# Altium PCB Rev3.PcbDoc (part 2 of 3)
Units mil, origin at the board's own origin, x right, y up, seen from the top; angles counter-clockwise.
Board outline 3350 x 2700 mil, 4 copper layers (Top Layer, GND, VCC, Bottom Layer), stack 23.756 mil thick; 157 components, 90 nets, 509 pads, 166 vias.
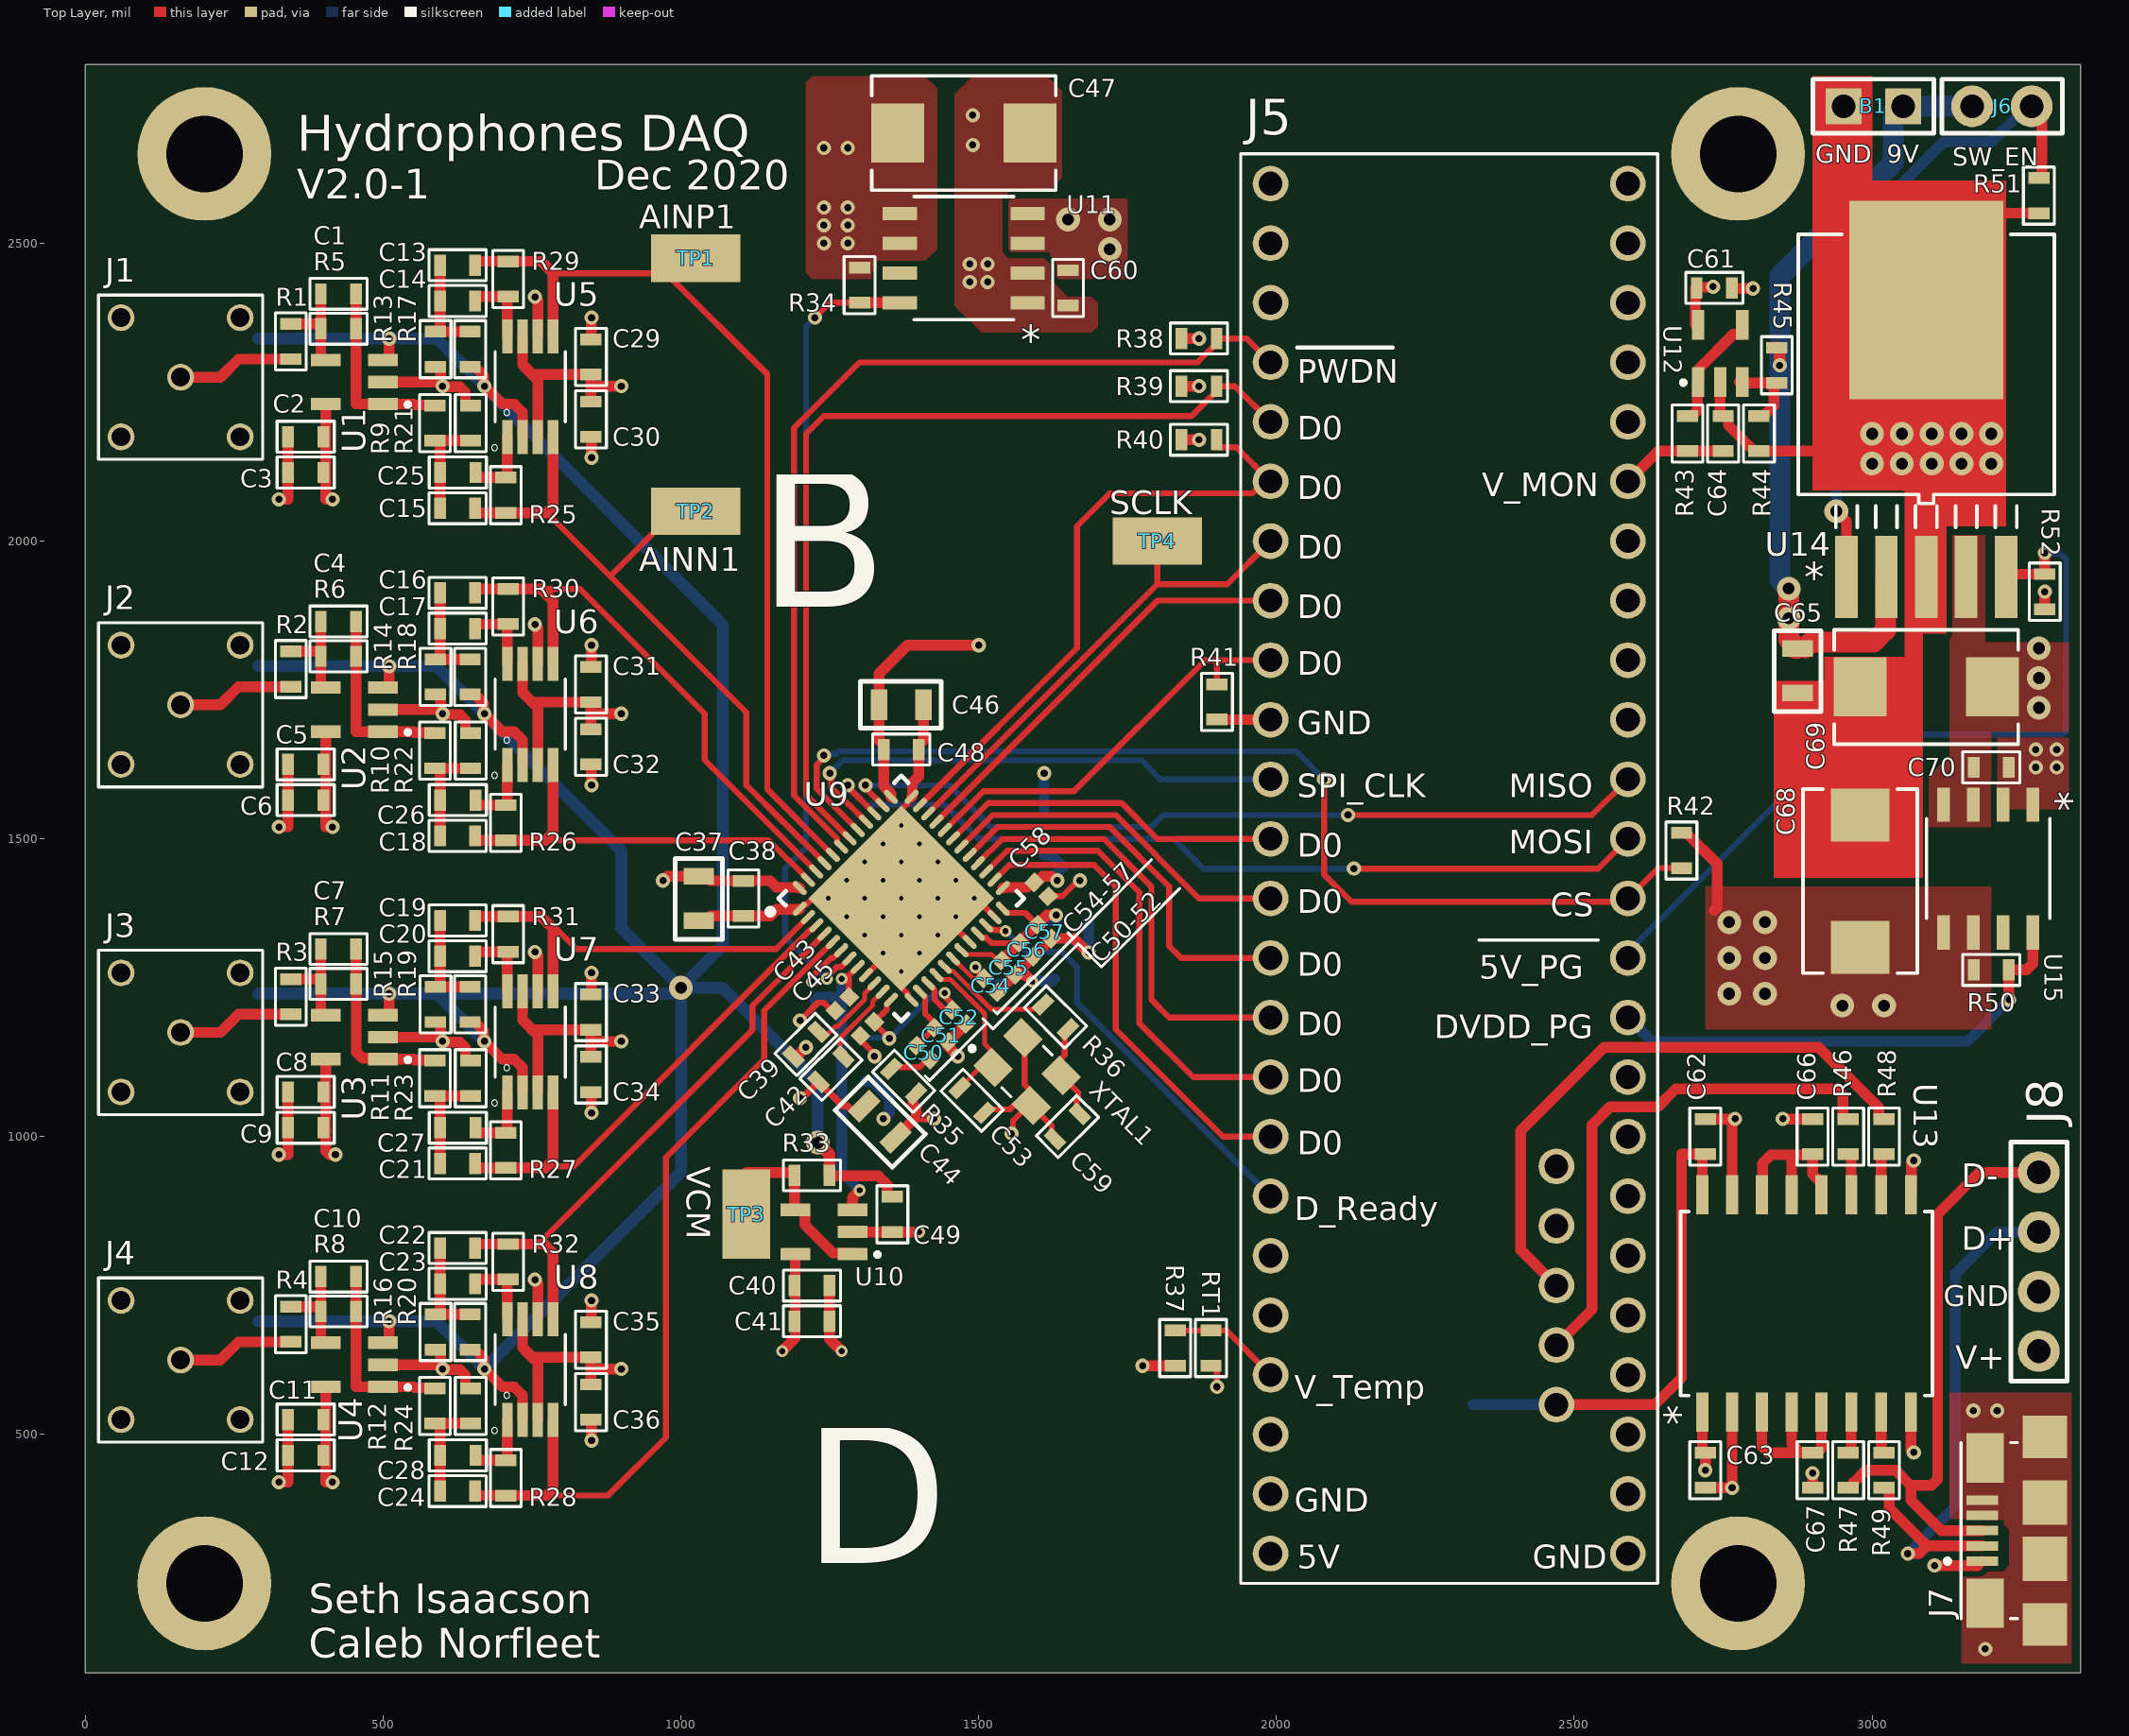
[diagram p0: Top Layer view]

## Part data (continued)
R9 R10 R11 R12 R17 R18 R19 R20: library part RP73PF1J523RBTDF, "RES SMD 523 OHM 0.1% 1/6W 0603", Case Code (Imperial)=0603, Case Code (Metric)=1608, Manufacturer 1="Vishay Dale", Manufacturer Part Number 1=TNPW060310K0BEEA, Max Operating Temperature=125°C, Max Power Dissipation=100mW, Min Operating Temperature=-55°C, Package Quantity=1, Resistance=10kR, Supplier Part Number 1=A110081CT-ND, Temperature Coefficient=25ppm/°C, Tolerance=1%, Voltage Rating=75V, Case/Package=0603, ComponentLink1Description=https://datasheet.ciiva.com/2483/tnpw-e3-2483253.pdf?src-supplier=Digi-Key, ComponentLink1URL=https://datasheet.ciiva.com/2483/tnpw-e3-2483253.pdf?src-supplier=Digi-Key, ComponentLink2Description=https://datasheet.ciiva.com/17190/tnpw-e3-17190917.pdf?src-supplier=Avnet+Europe, ComponentLink2URL=https://datasheet.ciiva.com/17190/tnpw-e3-17190917.pdf?src-supplier=Avnet+Europe, ComponentLink3Description=https://datasheet.ciiva.com/2483/tnpw-e3-2483254.pdf?src-supplier=Digi-Key, ComponentLink3URL=https://datasheet.ciiva.com/2483/tnpw-e3-2483254.pdf?src-supplier=Digi-Key, ComponentLink4Description=https://datasheet.ciiva.com/2483/tnpw-e3-2483255.pdf?src-supplier=Digi-Key, ComponentLink4URL=https://datasheet.ciiva.com/2483/tnpw-e3-2483255.pdf?src-supplier=Digi-Key, ComponentLink5Description=https://datasheet.ciiva.com/16335/tnpw-e3-16335132.pdf?src-supplier=Future+Electronics, ComponentLink5URL=https://datasheet.ciiva.com/16335/tnpw-e3-16335132.pdf?src-supplier=Future+Electronics, ComponentLink6Description=https://datasheet.ciiva.com/28589/1912606-28589004.pdf?src-supplier=Element14, ComponentLink6URL=https://datasheet.ciiva.com/28589/1912606-28589004.pdf?src-supplier=Element14, ComponentLink7Description=https://datasheet.ciiva.com/7792/tnpw-e3-7792477.pdf?src-supplier=Element14, ComponentLink7URL=https://datasheet.ciiva.com/7792/tnpw-e3-7792477.pdf?src-supplier=Element14, ComponentLink8Description=https://datasheet.ciiva.com/9050/tnpw-e3-9050974.pdf?src-supplier=Avnet, ComponentLink8URL=https://datasheet.ciiva.com/9050/tnpw-e3-9050974.pdf?src-supplier=Avnet, Composition="Thin Film", Contact Plating=Tin, Depth=0.85mm, Features="Moisture Resistant,Automotive AEC-Q200,Anti-Sulfur", Height=0.022inch, Length=1.6mm, Military Standard=Not, Mount="Surface Mount", Number of Terminations=2, Packaging="Tape and Reel", Power Rating=100mW, Pricing 1="1=0.65000, 10=0.46200, 100=0.24020, 1000=0.12936, 2500=0.12760 (USD)", Radiation Hardening=No, REACH SVHC=Unknown, RoHS=Yes, Stock 1=296181, Supplier 1=Digi-Key, Termination=SMD/SMT, Weight=7.1E-05oz, Width=0.033inch
R13 R14 R15 R16 R21 R22 R23 R24: library part RP73PF1J383RBTDF, "RES SMD 383 OHM ±0.1% 0.167W, 1/6W Chip Resistor 0603 (1608 Metric) - Thin Film", Case Code (Imperial)=0603, Case Code (Metric)=1608, Manufacturer 1="Vishay Dale", Manufacturer Part Number 1=TNPW060310K0BEEA, Max Operating Temperature=125°C, Max Power Dissipation=100mW, Min Operating Temperature=-55°C, Package Quantity=1, Resistance=10kR, Supplier Part Number 1=A110068CT-ND, Temperature Coefficient=25ppm/°C, Tolerance=1%, Voltage Rating=75V, Case/Package=0603, ComponentLink1Description=https://datasheet.ciiva.com/2483/tnpw-e3-2483253.pdf?src-supplier=Digi-Key, ComponentLink1URL=https://datasheet.ciiva.com/2483/tnpw-e3-2483253.pdf?src-supplier=Digi-Key, ComponentLink2Description=https://datasheet.ciiva.com/17190/tnpw-e3-17190917.pdf?src-supplier=Avnet+Europe, ComponentLink2URL=https://datasheet.ciiva.com/17190/tnpw-e3-17190917.pdf?src-supplier=Avnet+Europe, ComponentLink3Description=https://datasheet.ciiva.com/2483/tnpw-e3-2483254.pdf?src-supplier=Digi-Key, ComponentLink3URL=https://datasheet.ciiva.com/2483/tnpw-e3-2483254.pdf?src-supplier=Digi-Key, ComponentLink4Description=https://datasheet.ciiva.com/2483/tnpw-e3-2483255.pdf?src-supplier=Digi-Key, ComponentLink4URL=https://datasheet.ciiva.com/2483/tnpw-e3-2483255.pdf?src-supplier=Digi-Key, ComponentLink5Description=https://datasheet.ciiva.com/16335/tnpw-e3-16335132.pdf?src-supplier=Future+Electronics, ComponentLink5URL=https://datasheet.ciiva.com/16335/tnpw-e3-16335132.pdf?src-supplier=Future+Electronics, ComponentLink6Description=https://datasheet.ciiva.com/28589/1912606-28589004.pdf?src-supplier=Element14, ComponentLink6URL=https://datasheet.ciiva.com/28589/1912606-28589004.pdf?src-supplier=Element14, ComponentLink7Description=https://datasheet.ciiva.com/7792/tnpw-e3-7792477.pdf?src-supplier=Element14, ComponentLink7URL=https://datasheet.ciiva.com/7792/tnpw-e3-7792477.pdf?src-supplier=Element14, ComponentLink8Description=https://datasheet.ciiva.com/9050/tnpw-e3-9050974.pdf?src-supplier=Avnet, ComponentLink8URL=https://datasheet.ciiva.com/9050/tnpw-e3-9050974.pdf?src-supplier=Avnet, Composition="Thin Film", Contact Plating=Tin, Depth=0.85mm, Features="Moisture Resistant,Automotive AEC-Q200,Anti-Sulfur", Height=0.022inch, Length=1.6mm, Military Standard=Not, Mount="Surface Mount", Number of Terminations=2, Packaging="Tape and Reel", Power Rating=100mW, Pricing 1="1=0.65000, 10=0.46200, 100=0.24020, 1000=0.12936, 2500=0.12760 (USD)", Radiation Hardening=No, REACH SVHC=Unknown, RoHS=Yes, Stock 1=296181, Supplier 1=Digi-Key, Termination=SMD/SMT, Weight=7.1E-05oz, Width=0.033inch
R25 R26 R27 R28 R29 R30 R31 R32: library part 2-2176088-2, "RES SMD 1.27K OHM 0.1% 1/6W 0603", Case Code (Imperial)=0603, Case Code (Metric)=1608, Manufacturer 1="Vishay Dale", Manufacturer Part Number 1=TNPW060310K0BEEA, Max Operating Temperature=125°C, Max Power Dissipation=100mW, Min Operating Temperature=-55°C, Package Quantity=1, Resistance=10kR, Supplier Part Number 1=A110118CT-ND, Temperature Coefficient=25ppm/°C, Tolerance=1%, Voltage Rating=75V, Case/Package=0603, ComponentLink1Description=https://datasheet.ciiva.com/2483/tnpw-e3-2483253.pdf?src-supplier=Digi-Key, ComponentLink1URL=https://datasheet.ciiva.com/2483/tnpw-e3-2483253.pdf?src-supplier=Digi-Key, ComponentLink2Description=https://datasheet.ciiva.com/17190/tnpw-e3-17190917.pdf?src-supplier=Avnet+Europe, ComponentLink2URL=https://datasheet.ciiva.com/17190/tnpw-e3-17190917.pdf?src-supplier=Avnet+Europe, ComponentLink3Description=https://datasheet.ciiva.com/2483/tnpw-e3-2483254.pdf?src-supplier=Digi-Key, ComponentLink3URL=https://datasheet.ciiva.com/2483/tnpw-e3-2483254.pdf?src-supplier=Digi-Key, ComponentLink4Description=https://datasheet.ciiva.com/2483/tnpw-e3-2483255.pdf?src-supplier=Digi-Key, ComponentLink4URL=https://datasheet.ciiva.com/2483/tnpw-e3-2483255.pdf?src-supplier=Digi-Key, ComponentLink5Description=https://datasheet.ciiva.com/16335/tnpw-e3-16335132.pdf?src-supplier=Future+Electronics, ComponentLink5URL=https://datasheet.ciiva.com/16335/tnpw-e3-16335132.pdf?src-supplier=Future+Electronics, ComponentLink6Description=https://datasheet.ciiva.com/28589/1912606-28589004.pdf?src-supplier=Element14, ComponentLink6URL=https://datasheet.ciiva.com/28589/1912606-28589004.pdf?src-supplier=Element14, ComponentLink7Description=https://datasheet.ciiva.com/7792/tnpw-e3-7792477.pdf?src-supplier=Element14, ComponentLink7URL=https://datasheet.ciiva.com/7792/tnpw-e3-7792477.pdf?src-supplier=Element14, ComponentLink8Description=https://datasheet.ciiva.com/9050/tnpw-e3-9050974.pdf?src-supplier=Avnet, ComponentLink8URL=https://datasheet.ciiva.com/9050/tnpw-e3-9050974.pdf?src-supplier=Avnet, Composition="Thin Film", Contact Plating=Tin, Depth=0.85mm, Features="Moisture Resistant,Automotive AEC-Q200,Anti-Sulfur", Height=0.022inch, Length=1.6mm, Military Standard=Not, Mount="Surface Mount", Number of Terminations=2, Packaging="Tape and Reel", Power Rating=100mW, Pricing 1="1=0.65000, 10=0.46200, 100=0.24020, 1000=0.12936, 2500=0.12760 (USD)", Radiation Hardening=No, REACH SVHC=Unknown, RoHS=Yes, Stock 1=296181, Supplier 1=Digi-Key, Termination=SMD/SMT, Weight=7.1E-05oz, Width=0.033inch
R33 R35: library part TNPW06031K00BEEA, "RES 1K OHM 0.1% 1/8W 0603", Case Code (Imperial)=0603, Case Code (Metric)=1608, Manufacturer 1="Vishay Dale", Max Operating Temperature=125°C, Max Power Dissipation=100mW, Min Operating Temperature=-55°C, Package Quantity=1, Resistance=1kR, Supplier Part Number 1=TNP1.00KAACT-ND, Temperature Coefficient=25ppm/°C, Tolerance=1%, Voltage Rating=75V, Case/Package=0603, ComponentLink1Description=https://datasheet.ciiva.com/2528/tnpw-e3-2528472.pdf?src-supplier=Digi-Key, ComponentLink1URL=https://datasheet.ciiva.com/2528/tnpw-e3-2528472.pdf?src-supplier=Digi-Key, ComponentLink2Description=https://datasheet.ciiva.com/2528/tnpw-e3-2528473.pdf?src-supplier=Digi-Key, ComponentLink2URL=https://datasheet.ciiva.com/2528/tnpw-e3-2528473.pdf?src-supplier=Digi-Key, ComponentLink3Description=https://datasheet.ciiva.com/9112/tnpw-e3-9112138.pdf?src-supplier=Avnet, ComponentLink3URL=https://datasheet.ciiva.com/9112/tnpw-e3-9112138.pdf?src-supplier=Avnet, ComponentLink4Description=https://datasheet.ciiva.com/16391/tnpw-e3-16391675.pdf?src-supplier=Future+Electronics, ComponentLink4URL=https://datasheet.ciiva.com/16391/tnpw-e3-16391675.pdf?src-supplier=Future+Electronics, ComponentLink5Description=https://datasheet.ciiva.com/9112/tnpw-e3-9112141.pdf?src-supplier=Avnet, ComponentLink5URL=https://datasheet.ciiva.com/9112/tnpw-e3-9112141.pdf?src-supplier=Avnet, ComponentLink6Description=https://datasheet.ciiva.com/16782/70201627-16782047.pdf?src-supplier=Allied+Electronics, ComponentLink6URL=https://datasheet.ciiva.com/16782/70201627-16782047.pdf?src-supplier=Allied+Electronics, Composition="Thin Film", Contact Plating=Tin, Depth=0.85mm, Features="Moisture Resistant,Automotive AEC-Q200,Anti-Sulfur", Height=0.45mm, Lead Free="Lead Free", Length=1.6mm, Manufacturer Part Number 1=TNPW06031K00BEEA, Military Standard=Not, Mount="Surface Mount", Number of Terminations=2, Packaging="Tape and Reel", Power Rating=100mW, Pricing 1="1=0.65000, 10=0.46200, 100=0.24020, 1000=0.12936, 2500=0.12760 (USD)", Radiation Hardening=No, REACH SVHC=Unknown, RoHS=Yes, Stock 1=92047, Supplier 1=Digi-Key, Termination=SMD/SMT, Voltage Rating (DC)=75V, Weight=7.1E-05oz, Width=0.033inch
R34 R43 R50: library part CRGCQ0603F150K, "CRGCQ 0603 150K 1%", Case Code (Imperial)=0603, Case Code (Metric)=1608, Manufacturer 1=Yageo, Manufacturer Part Number 1=RC0603JR-0710KL, Max Operating Temperature=155°C, Min Operating Temperature=-55°C, Power Rating=100mW, Resistance=10kR, Supplier Part Number 1=311-10KGRCT-ND, Temperature Coefficient=100ppm/°C, Tolerance=5%, Voltage Rating=50V, Case/Package=0603, ComponentLink1Description=https://datasheet.ciiva.com/2452/pyu-rc0603-51-rohs-l-4-2452848.pdf?src-supplier=Digi-Key, ComponentLink1URL=https://datasheet.ciiva.com/2452/pyu-rc0603-51-rohs-l-4-2452848.pdf?src-supplier=Digi-Key, ComponentLink2Description=https://datasheet.ciiva.com/7746/443971-7746427.pdf?src-supplier=Element14, ComponentLink2URL=https://datasheet.ciiva.com/7746/443971-7746427.pdf?src-supplier=Element14, ComponentLink3Description=https://datasheet.ciiva.com/22747/443971-22747531.pdf?src-supplier=Element14, ComponentLink3URL=https://datasheet.ciiva.com/22747/443971-22747531.pdf?src-supplier=Element14, ComponentLink4Description=https://datasheet.ciiva.com/7746/443971-7746428.pdf?src-supplier=Element14, ComponentLink4URL=https://datasheet.ciiva.com/7746/443971-7746428.pdf?src-supplier=Element14, ComponentLink5Description=https://datasheet.ciiva.com/15189/getdatasheetpartid-327958-15189847.pdf?src-supplier=Verical, ComponentLink5URL=https://datasheet.ciiva.com/15189/getdatasheetpartid-327958-15189847.pdf?src-supplier=Verical, ComponentLink6Description=https://datasheet.ciiva.com/8883/pyu-rc0603-51-rohs-l-4-8883049.pdf?src-supplier=Avnet, ComponentLink6URL=https://datasheet.ciiva.com/8883/pyu-rc0603-51-rohs-l-4-8883049.pdf?src-supplier=Avnet, Composition="Thick Film", Contact Plating=Tin,Matte, Depth=0.8mm, Lead Free="Lead Free", Length=1.6mm, Military Standard=Not, Number of Pins=2, Packaging="Tape and Reel", Pricing 1="1=0.10000, 10=0.01700, 100=0.00710, 1000=0.00318, 2500=0.00276 (USD)", Radiation Hardening=No, REACH SVHC=Unknown, RoHS=Yes, Stock 1=22910838, Supplier 1=Digi-Key, Termination=SMD/SMT, Voltage Rating (DC)=50V, Width=0.8mm
R36: library part RP73PF1J121RBTDF, "TE CONNECTIVITY         RP73PF1J121RBTDF             SMD Chip Resistor, Thin Film, 121 ohm, 100 V, 0603 [1608 Metric], 166 mW,  0.1%, RN73 Series", Case Code (Imperial)=0603, Case Code (Metric)=1608, Manufacturer 1="TE Connectivity", Max Operating Temperature=155°C, Max Power Dissipation=167mW, Min Operating Temperature=-55°C, Package Quantity=1000, Power Rating=166mW, Resistance=121R, Supplier Part Number 1=A110020CT-ND, Temperature Coefficient=25ppm/°C, Tolerance=0.1%, Voltage Rating=100V, Case/Package=0603, ComponentLink1Description=https://datasheet.ciiva.com/7801/1635325-7801605.pdf?src-supplier=Element14, ComponentLink1URL=https://datasheet.ciiva.com/7801/1635325-7801605.pdf?src-supplier=Element14, ComponentLink2Description=https://datasheet.ciiva.com/18601/eng-ds-1773272-j-18601303.pdf?src-supplier=Digi-Key, ComponentLink2URL=https://datasheet.ciiva.com/18601/eng-ds-1773272-j-18601303.pdf?src-supplier=Digi-Key, ComponentLink3Description=https://datasheet.ciiva.com/18601/eng-ds-1773272-j-18601304.pdf?src-supplier=Digi-Key, ComponentLink3URL=https://datasheet.ciiva.com/18601/eng-ds-1773272-j-18601304.pdf?src-supplier=Digi-Key, ComponentLink4Description=https://datasheet.ciiva.com/18601/eng-ds-1773272-j-18601305.pdf?src-supplier=Digi-Key, ComponentLink4URL=https://datasheet.ciiva.com/18601/eng-ds-1773272-j-18601305.pdf?src-supplier=Digi-Key, Composition="Thin Film", Depth=0.8mm, Height=0.022inch, Length=0.061inch, Manufacturer Part Number 1=RP73PF1J121RBTDF, Mount="Surface Mount", Number of Terminations=2, Packaging="Tape and Reel", Pricing 1="1=0.66000, 10=0.48500, 100=0.28230 (USD)", REACH SVHC="No SVHC", RoHS=Yes, Stock 1=850, Supplier 1=Digi-Key, Termination=Solder, Voltage Rating (DC)=100V, Width=0.031inch
R37 R38 R39 R40 R41 R42 R44 R51 R52: library part RC0603JR-0710KL, "RES SMD 10K OHM 5% 1/10W 0603"
R45: library part MCT06030E2002BP500, "Res Thin Film 0603 20K Ohm 0.1% 0.1W(1/10W) ±15ppm/C Molded SMD Automotive Medical Paper T/R", Case/Package=0603, Manufacturer 1="Vishay Semiconductors", Max Operating Temperature=125°C, Min Operating Temperature=-55°C, Resistance=20kR, Supplier Part Number 1=749-1747-1-ND, Temperature Coefficient=15ppm/°C, Tolerance=0.1%, ComponentLink1Description=https://datasheet.ciiva.com/17185/mc-pre-17185448.pdf?src-supplier=Avnet+Europe, ComponentLink1URL=https://datasheet.ciiva.com/17185/mc-pre-17185448.pdf?src-supplier=Avnet+Europe, ComponentLink2Description=https://datasheet.ciiva.com/8897/mc-pre-8897916.pdf?src-supplier=Avnet, ComponentLink2URL=https://datasheet.ciiva.com/8897/mc-pre-8897916.pdf?src-supplier=Avnet, Composition="Thin Film", Contact Plating=Tin, Depth=0.85mm, Lead Free="Lead Free", Length=1.55mm, Manufacturer Part Number 1=MCT06030E2002BP500, Military Standard=Not, Packaging="Tape and Reel", Pricing 1="1=0.70000, 10=0.58600, 100=0.39360, 1000=0.23128 (USD)", Radiation Hardening=No, RoHS=Yes, Stock 1=75960, Supplier 1=Digi-Key
R46 R47 R48 R49: library part ERJU03F24R0V, "Thick Film Resistors - SMD 0603 1% 24ohm Anti-Sulfur AEC-Q200", Case Code (Imperial)=0603, Case Code (Metric)=1608, Current Rating=1A, Manufacturer 1=Panasonic, Max Operating Temperature=155°C, Min Operating Temperature=-55°C, Package Quantity=5000, Power Rating=100mW, Resistance=24R, Resistor Type="Thick Film", Supplier Part Number 1=10-ERJ-U03F24R0VCT-ND, Temperature Coefficient=100ppm/°C, Tolerance=1%, Voltage Rating=75V, Case/Package=0603, Category="Chip SMD Resistors", ComponentLink1Description=https://datasheet.ciiva.com/24124/ras-erj-u-267552-24124922.pdf?src-supplier=Mouser, ComponentLink1URL=https://datasheet.ciiva.com/24124/ras-erj-u-267552-24124922.pdf?src-supplier=Mouser, ComponentLink2Description=https://datasheet.ciiva.com/6201/1638979-6201577.pdf?src-supplier=Farnell, ComponentLink2URL=https://datasheet.ciiva.com/6201/1638979-6201577.pdf?src-supplier=Farnell, Depth=0.8mm, Height=0.45mm, Length=1.6mm, Manufacturer Part Number 1=ERJU03F24R0V, Packaging="Tape and Reel", Pricing 1="1=0.13000, 10=0.11400, 100=0.04400, 1000=0.01936, 2500=0.01672 (USD)", REACH SVHC="No SVHC", RoHS=Yes, Stock 1=298, Supplier 1=Digi-Key, Termination=SMD/SMT, Voltage Rating (DC)=75V, Weight=7.1E-05oz, Width=0.8mm
RT1: library part ERT-J1VG103JA, "Thermistor NTC 10KOhm 5% 2-Pin 0603 Punched Carrier T/R", Case Code (Imperial)=0603, Case Code (Metric)=1608, Manufacturer 1=Panasonic, Max Operating Temperature=125°C, Max Power Dissipation=100mW, Min Operating Temperature=-40°C, Package Quantity=4000, Resistance=10kR, Supplier Part Number 1=P12014CT-ND, Tolerance=5%, Accuracy=1%, Case/Package=0603, ComponentLink1Description=https://datasheet.ciiva.com/1303/1314428-1303168.pdf?src-supplier=Farnell, ComponentLink1URL=https://datasheet.ciiva.com/1303/1314428-1303168.pdf?src-supplier=Farnell, ComponentLink2Description=https://datasheet.ciiva.com/30067/aua0000ce1-30067157.pdf?src-supplier=Onlinecomponents.com, ComponentLink2URL=https://datasheet.ciiva.com/30067/aua0000ce1-30067157.pdf?src-supplier=Onlinecomponents.com, ComponentLink3Description=https://datasheet.ciiva.com/46376/1314428-46376550.pdf?src-supplier=Element14, ComponentLink3URL=https://datasheet.ciiva.com/46376/1314428-46376550.pdf?src-supplier=Element14, ComponentLink4Description=https://datasheet.ciiva.com/2848/aua0000ce1-2848556.pdf?src-supplier=Digi-Key, ComponentLink4URL=https://datasheet.ciiva.com/2848/aua0000ce1-2848556.pdf?src-supplier=Digi-Key, ComponentLink5Description=https://datasheet.ciiva.com/16394/aua0000ce1-16394028.pdf?src-supplier=Future+Electronics, ComponentLink5URL=https://datasheet.ciiva.com/16394/aua0000ce1-16394028.pdf?src-supplier=Future+Electronics, ComponentLink6Description=https://datasheet.ciiva.com/46388/1314428-46388812.pdf?src-supplier=Element14, ComponentLink6URL=https://datasheet.ciiva.com/46388/1314428-46388812.pdf?src-supplier=Element14, ComponentLink7Description=https://datasheet.ciiva.com/2848/aua0000ce1-2848557.pdf?src-supplier=Digi-Key, ComponentLink7URL=https://datasheet.ciiva.com/2848/aua0000ce1-2848557.pdf?src-supplier=Digi-Key, ComponentLink8Description=https://datasheet.ciiva.com/2848/aua0000ce1-2848558.pdf?src-supplier=Digi-Key, ComponentLink8URL=https://datasheet.ciiva.com/2848/aua0000ce1-2848558.pdf?src-supplier=Digi-Key, ComponentLink9Description=https://datasheet.ciiva.com/3280/aua0000ce1-3280462.pdf?src-supplier=Avnet, ComponentLink9URL=https://datasheet.ciiva.com/3280/aua0000ce1-3280462.pdf?src-supplier=Avnet, Depth=0.8mm, Lead Free="Lead Free", Length=1.6mm, Manufacturer Part Number 1=ERT-J1VG103JA, Mount="Surface Mount", Number of Pins=2, Packaging="Tape and Reel", Pricing 1="1=0.15000, 5=0.14600, 10=0.13000, 25=0.12000, 50=0.09600, 100=0.08240, 500=0.07208, 1000=0.06178 (USD)", Radiation Hardening=No, REACH SVHC="No SVHC", RoHS=Yes, Stock 1=47318, Supplier 1=Digi-Key, Termination=SMD/SMT, Width=800um
TP1 TP2 TP4: "5029 SMD 0805 TP", Supplier Part Number 1=36-5029CT-ND, Supplier 1=Digi-Key
TP3: "RCT-0C SMD 0805 TP", Supplier Part Number 1=A106144CT-ND, Supplier 1=Digi-Key
U1 U2 U3 U4: library part OPA320AQDBVRQ1, "General Purpose Amplifier Circuit Rail-to-Rail SOT-23-5", Manufacturer 1="Texas Instruments", Manufacturer Part Number 1=OPA325IDBVR, Supplier Part Number 1=296-OPA325IDBVRCT-ND, Pricing 1="1=1.69000, 10=1.51600, 25=1.43000, 100=1.14400, 250=1.00100, 500=0.97240, 1000=0.77220 (USD)", RoHS=No, Stock 1=2034, Supplier 1=Digi-Key
U5 U6 U7 U8: "Low Noise, Precision, 150MHz, Fully Differential Amplifier 8-VSSOP -40 to 125", Case/Package=VSSOP, Input Bias Current=1uA, Input Offset Voltage (Vos)=50uV, Manufacturer 1="Texas Instruments", Max Operating Temperature=125°C, Min Operating Temperature=-40°C, Operating Supply Current=1.35mA, Output Current per Channel=65mA, Supplier Part Number 1=296-44771-1-ND, -3db Bandwidth=150MHz, Bandwidth=135MHz, ComponentLink1Description=http://www.ti.com/lit/ds/symlink/ths4551.pdf?src-supplier=Digi-Key, ComponentLink1URL=http://www.ti.com/lit/ds/symlink/ths4551.pdf?src-supplier=Digi-Key, ComponentLink2Description=http://www.ti.com/general/docs/lit/getliterature.tsp?genericPartNumber=THS4551&fileType=pdf&src-supplier=Farnell, ComponentLink2URL=http://www.ti.com/general/docs/lit/getliterature.tsp?genericPartNumber=THS4551&fileType=pdf&src-supplier=Farnell, ComponentLink3Description=http://www.farnell.com/datasheets/2148327.pdf?src-supplier=Element14, ComponentLink3URL=http://www.farnell.com/datasheets/2148327.pdf?src-supplier=Element14, ComponentLink4Description=https://octopart.com/click/track?ai=2118&ct=datasheets&sig=0013830&at=physicalpart&sid=370&ppid=71776714&hlid=24961842&src-supplier=TI+store, ComponentLink4URL=https://octopart.com/click/track?ai=2118&ct=datasheets&sig=0013830&at=physicalpart&sid=370&ppid=71776714&hlid=24961842&src-supplier=TI+store, ComponentLink5Description=http://sigma.octopart.com/49250154/technical_drawing/Texas-Instruments-THS4551IDGKT.pdf?src-supplier=TI+store, ComponentLink5URL=http://sigma.octopart.com/49250154/technical_drawing/Texas-Instruments-THS4551IDGKT.pdf?src-supplier=TI+store, ComponentLink6Description=http://datasheet.octopart.com/THS4551IDGKT-Texas-Instruments-datasheet-78835010.pdf?src-supplier=Element14, ComponentLink6URL=http://datasheet.octopart.com/THS4551IDGKT-Texas-Instruments-datasheet-78835010.pdf?src-supplier=Element14, ComponentLink7Description=http://datasheet.octopart.com/THS4551IDGKT-Texas-Instruments-datasheet-67294894.pdf?src-supplier=Newark, ComponentLink7URL=http://datasheet.octopart.com/THS4551IDGKT-Texas-Instruments-datasheet-67294894.pdf?src-supplier=Newark, ComponentLink8Description=https://www.te.com/commerce/DocumentDelivery/DDEController?Action=srchrtrv&DocNm=1773204-3&DocType=DS&DocLang=English&src-supplier=Digi-Key, ComponentLink8URL=https://www.te.com/commerce/DocumentDelivery/DDEController?Action=srchrtrv&DocNm=1773204-3&DocType=DS&DocLang=English&src-supplier=Digi-Key, ComponentLink9Description=https://www.te.com/commerce/DocumentDelivery/DDEController?Action=srchrtrv&amp;DocNm=1773204-3&amp;DocType=DS&amp;DocLang=English&src-supplier=Digi-Key, ComponentLink9URL=https://www.te.com/commerce/DocumentDelivery/DDEController?Action=srchrtrv&amp;DocNm=1773204-3&amp;DocType=DS&amp;DocLang=English&src-supplier=Digi-Key, Gain Bandwidth Product=135MHz, Lead Free="Lead Free", Manufacturer Part Number 1=THS4551IDGKT, Mount="Surface Mount", Number of Amplifiers=1, Number of Channels=1, Number of Circuits=1, Number of Pins=8, Packaging="Cut Tape", Pricing 1="1=3.84000, 10=3.44900, 100=2.82600 (USD)", REACH SVHC="No SVHC", RoHS=No, Slew Rate=220V/µs, Stock 1=3028, Supplier 1=Digi-Key
U9: library part CMP-0313-02423-1, "Continuous Time Data Acquisition ADC, 4-Channel, 16-Bit, -40 to 125 degC, 48-Pin QFN (CS-48-1), RoHS, Tray", Temperature Max="125 degC", Temperature Min="-40 degC", AVDD Max="3.6 V", AVDD Min="2.97 V", Channel=4, ComponentLink1Description="Manufacturer URL", ComponentLink1URL=http://www.analog.com/en/index.html, ComponentLink2Description=Datasheet, ComponentLink2URL=http://www.analog.com/media/en/technical-documentation/data-sheets/ADAR7251.pdf, ComponentLink3Description="Package Specification", ComponentLink3URL=http://www.analog.com/media/en/package-pcb-resources/package/pkg_pdf/lfcsp-cs-side-solderable/cs-48/CS_48_1.pdf, DatasheetVersion="Rev. 0", DVDD Max="1.98 V", DVDD Min="1.62 V", Mounting Technology="Surface Mount", Number of A/D Converters=4, PackageDescription="48-Pin Frame Chip Scale Package, Body 7 x 7 mm, Pitch 0.5 mm", PackageVersion=01/2014, Packing=Tray, PartNumber=ADAR7251WBCSZ, RoHS=TRUE, Sample Rate Max="1.8 MSPS"
U10 U12: library part OPA325IDBVR, Manufacturer 1="Texas Instruments", Supplier Part Number 1=296-OPA325IDBVRCT-ND, Manufacturer Part Number 1=OPA325IDBVR, Pricing 1="1=1.69000, 10=1.51600, 25=1.43000, 100=1.14400, 250=1.00100, 500=0.97240, 1000=0.77220 (USD)", RoHS=No, Stock 1=2034, Supplier 1=Digi-Key
U11 U15: "3.3V Linear Voltage Regulator IC 1 Output 1A 8-SOIC", Built_By=EMA_UL_Team, Copyright="Copyright (C) 2018 Accelerated Designs. All rights reserved", Manufacturer_Part_Number=TPS76833QD, RefDes=RefDes, SourceLibrary=TI_2011-12-14_2, Type=DEV, Vendor="Texas Instruments"
U13: "USB Isolation", Built_By=EMA_UL_Team, Copyright="Copyright (C) 2018 Accelerated Designs. All rights reserved", Manufacturer_Part_Number=ADUM3160BRWZ, RefDes=RefDes, SourceLibrary=Analog_2015-12-15, Type=DEV, Vendor="Analog Devices Inc"
U14: "LDO Regulator Pos 5V 3A Automotive 6-Pin(5+Tab) TO-263 T/R", Manufacturer 1=Microchip, Supplier Part Number 1=MIC29301-5.0WU-CT-ND, Category="Voltage Regulators - Linear", ComponentLink1Description=https://datasheet.ciiva.com/16389/mic29150-16389820.pdf?src-supplier=Future+Electronics, ComponentLink1URL=https://datasheet.ciiva.com/16389/mic29150-16389820.pdf?src-supplier=Future+Electronics, ComponentLink2Description=https://datasheet.ciiva.com/2064/mic29150-2064680.pdf?src-supplier=Digi-Key, ComponentLink2URL=https://datasheet.ciiva.com/2064/mic29150-2064680.pdf?src-supplier=Digi-Key, Manufacturer Part Number 1=MIC29301-5.0WU-TR, Pricing 1="1=4.14000, 25=3.45000, 100=3.14000 (USD)", RoHS=Yes, Stock 1=1017, Supplier 1=Digi-Key
XTAL1: "Crystal 19.2MHz ±25ppm (Tol) ±30ppm (Stability) 12pF FUND 80Ohm 4-Pin Mini-CSMD T/R", Manufacturer 1="ECS International", Supplier Part Number 1=XC2452CT-ND, Manufacturer Part Number 1=ECS-192-12-33-AGM-TR, Pricing 1="1=0.56000, 10=0.46500, 50=0.41820, 100=0.37180, 500=0.35322 (USD)", Stock 1=1382, Supplier 1=Digi-Key

## Free pads (board coordinates)
  round 225 hole 128.5: 53(200,2650) 54(200,250) 55(2775,250) 56(2775,2650)

## Via types
v1: diameter 24, hole 12, Top Layer to Bottom Layer, tented both sides, 101 vias
v2: diameter 40, hole 20, Top Layer to Bottom Layer, tented both sides, 29 vias
v3: diameter 19.68, hole 7.87, Top Layer to Bottom Layer, 25 vias
v4: diameter 20, hole 10, Top Layer to Bottom Layer, tented both sides, 11 vias

## Nets (pads, with @x,y where several pads share a name; then routed paths per layer and width w, separated by ;. In a path a pad name is that pad's centre, name@x,y a point inside that pad or via, vN(x,y) a via of type N, cw(c..) or ccw(c..) an arc to the next point about the centre after c; other vN are vias at no path point)
5V: C60.2 C62.2 C69.2 C70.2 J5.48 J5.53 U11.3 U11.4 U13.16 U14.4 U15.3 U15.4 | length 871.3
  Top Layer w18: J5.53@2469.92,550 2635,550 2680,595 2680,970.47 2715.84,970.47 2715,969.63 U13.16@2715,902.5 2715,880.91 U13.16@2714,879.91
  Bottom Layer w18: 2330,550 J5.53@2469.92,550
  other v2: 3280,1720 3280,1770 3280,1820 1720,2490 1650,2540 1720,2540
9V: B1.+ C65.2 J6.2 R45.1 U14.2 | length 1449.3
  Top Layer w20: R45.1@2835,2324.53 R45.1@2842.56,2324.53 ; R45.1@2840,2324.53 2845,2324.53 v1(2845,2295)
  Top Layer w25: C65.2@2875,1819.8 2886.81,1819.8 C65.2@2888.09,1821.08
  Top Layer w35: v2(2860,1920) 2860,1834.8 2866.91,1827.89 2866.91,1823.52 2870.63,1819.8 C65.2@2875,1819.8 ; C65.2@2888.09,1821.08 2897.01,1830 3002,1830 3022.5,1850.5 3022.5,1938.5 U14.2@3024,1940
  Bottom Layer w35: v2(2860,1920) 2845,1935 v1(2845,2295) 2845,2445 3035.5,2635.5 3035.5,2721.5 3048,2734 B1.+@3052,2730 J6.2@3190,2730
  other v2: 2860,1870
ADC_DATA0: J5.41 U9.26 | length 803.2
  Top Layer w10: U9.26@1526.59,1431.32 1551.38,1456.1 1693.9,1456.1 1730,1420 1730,1180 1910,1000 J5.41@1990,1000
ADC_DATA1: J5.40 U9.27 | length 778
  Top Layer w10: U9.27@1512.67,1445.24 1547.44,1480 1700,1480 1770,1410 1770,1190 1860,1100 J5.40@1990,1100
ADC_DATA2: J5.39 U9.28 | length 743.7
  Top Layer w10: U9.28@1498.75,1459.16 1539.6,1500 1710,1500 1790,1420 1790,1230 1820,1200 J5.39@1990,1200
ADC_DATA3: J5.38 U9.29 | length 674.3
  Top Layer w10: U9.29@1484.84,1473.08 1531.76,1520 1720,1520 1820,1420 1820,1320 1840,1300 J5.38@1990,1300
ADC_DATA4: J5.37 U9.30 | length 599
  Top Layer w10: U9.30@1470.92,1487 1523.92,1540 1730,1540 1870,1400 J5.37@1990,1400
ADC_DATA5: J5.36 U9.31 | length 582.3
  Top Layer w10: U9.31@1457,1500.92 1516.08,1560 1740,1560 1800,1500 J5.36@1990,1500
ADC_DATA6: J5.33 R41.2 U9.32 | length 706.6
  Top Layer w10: U9.32@1443.08,1514.84 1508.24,1580 1660,1580 1880,1800 1902.71,1800 ; R41.2@1900,1759.53 1900,1797.29 1902.71,1800 ; J5.33@1990,1800 1902.71,1800
ADC_DATA7: J5.32 U9.33 | length 714.6
  Top Layer w10: U9.33@1429.16,1528.75 1800.4,1900 J5.32@1990,1900
AINN1: C15.2 R25.2 TP2.1 U5.4 U9.45 | length 1229.3
  Top Layer w10: 774.84,2047.47 881.16,1941.16 ; TP2.1@1025,2050 990,2050 881.16,1941.16 ; U9.45@1241.25,1459.16 1172.4,1528 1172,1528 1110,1590 1110,1712.31 881.16,1941.16
  Top Layer w18: C15.2@654.53,2055 654.53,2048.31 655.37,2047.47 R25.2@706,2047.47 774.84,2047.47 785.39,2058.02 U5.4@785.39,2174.35
AINN2: C18.2 R26.2 U6.4 U9.47 | length 725.5
  Top Layer w10: 760,1497.47 772.47,1497.47 1147.25,1497.47 U9.47@1213.41,1431.32
  Top Layer w18: C18.2@654.53,1505 654.53,1498.31 655.37,1497.47 R26.2@706,1497.47 760,1497.47 ; 772.47,1497.47 785.39,1510.39 U6.4@785.39,1624.35